# EAGLE board lab 3 hw REWORK (EAGLE 9.7.0)

Size 163.45 x 71.86 mm. Coordinates in mm from the lower left corner, seen from the top.
Outline: 0,0 163.46,0 163.46,71.86 0,71.86 0,0
Copper layers (1*16): Top 0.035mm / dielectric 1.5mm / Bottom 0.035mm
Design rules "default": minimum track width 6mil, minimum drill 0.35mm, track to track 6mil, track to pad 6mil, pad to pad 6mil, via to via 6mil, smd to smd 6mil, copper to edge 40mil, drill to drill 6mil, minimum pad ring 10mil, minimum via ring 8mil, stop-mask expansion 4mil, vias tented up to drill 0mil, thermal gap 10mil

## Footprints (pad centres in the part's own frame; a part is rotated, then mirrored left to right if it is on the bottom)
LEDRD254W60D565H860B = drill 0.981 pad 1.581: 1 -1.27,0; 2 1.27,0
LEDRD254W60D565H860B_G = drill 0.981 pad 1.581: 1 -1.27,0; 2 1.27,0
LEDRD254W60D565H860B_O = drill 0.981 pad 1.581: 1 -1.27,0; 2 1.27,0
BATTERY-GENERIC = drill 1.118 pad 3.15 octagon: + 2.54,0; - -2.54,0
RESAD1016W63L850D250B = drill 0.83 pad 1.43: 1 -5.08,0; 2 5.08,0
78B06ST = drill 0.8: 1 -6.35,-3.81; 2 -3.81,-3.81; 3 -1.27,-3.81; 4 1.27,-3.81; 5 3.81,-3.81; 6 6.35,-3.81; 7 6.35,3.81; 8 3.81,3.81; 9 1.27,3.81; 10 -1.27,3.81; 11 -3.81,3.81; 12 -6.35,3.81
DIP762W53P254L1969H508Q14B = drill 0.743 pad 1.343: 1 -3.81,7.62; 2 -3.81,5.08; 3 -3.81,2.54; 4 -3.81,0; 5 -3.81,-2.54; 6 -3.81,-5.08; 7 -3.81,-7.62; 8 3.81,-7.62; 9 3.81,-5.08; 10 3.81,-2.54; 11 3.81,0; 12 3.81,2.54; 13 3.81,5.08; 14 3.81,7.62

## Placement (x,y rotation side)
D1  RED  [LEDRD254W60D565H860B]  6.06,39.57 180 top
D2  GREEN  [LEDRD254W60D565H860B_G]  11.14,39.57 180 top
D3  RED  [LEDRD254W60D565H860B]  16.22,39.57 180 top
D4  ORANGE  [LEDRD254W60D565H860B_O]  21.3,39.57 180 top
P3  BATTERYGENERIC  [BATTERY-GENERIC]  78.27,63.61 180 top
R1  100  [RESAD1016W63L850D250B]  7.33,29.41 90 top
R2  100  [RESAD1016W63L850D250B]  12.41,29.41 90 top
R3  100  [RESAD1016W63L850D250B]  17.49,29.41 90 top
R4  100  [RESAD1016W63L850D250B]  22.57,29.41 90 top
R5  100  [RESAD1016W63L850D250B]  152.11,9.77 240 top
R6  100  [RESAD1016W63L850D250B]  149.57,9.77 240 top
R7  100  [RESAD1016W63L850D250B]  147.03,9.77 240 top
R8  100  [RESAD1016W63L850D250B]  144.49,9.77 240 top
R9  100  [RESAD1016W63L850D250B]  141.95,9.77 240 top
R10  100  [RESAD1016W63L850D250B]  154.65,9.77 240 top
SW1  SPST-678B06ST  [78B06ST]  150.84,28.14 0 top
U1  74HC08_PDIP  [DIP762W53P254L1969H508Q14B]  40.35,28.14 90 top
U2  74HC32_PDIP  [DIP762W53P254L1969H508Q14B]  63.21,28.14 90 top
U3  74HC04_PDIP  [DIP762W53P254L1969H508Q14B]  86.07,28.14 90 top
U4  74HC86_PDIP  [DIP762W53P254L1969H508Q14B]  119.09,28.14 90 top

## Library data of the parts
D1 D3 = Tinkercad; CATEGORY: Opto-Electronic; SUB-CATEGORY: LED; VALUE: LED_RED
D2 = Tinkercad; CATEGORY: Opto-Electronic; SUB-CATEGORY: LED; VALUE: LED_GREEN
D4 = Tinkercad; CATEGORY: Opto-Electronic; SUB-CATEGORY: LED; VALUE: LED_ORANGE
P3 R1-R10 SW1 U1-U4 = Tinkercad

## Nets
D1_A: D1.1 R1.2
D2_A: D2.1 R2.2
D3_A: D3.1 R3.2
D4_A: D4.1 R4.2
P3+: P3.+ SW1.7 SW1.8 SW1.9 SW1.10 SW1.11 SW1.12 U1.14 U2.14 U3.14
P3-: D1.2 D2.2 D3.2 D4.2 P3.- R5.2 R6.2 R7.2 R8.2 R9.2 R10.2 U1.7 U2.7 U3.7
SW1_4: R6.1 SW1.4
SW1_5: R5.1 SW1.5
SW1_6: R10.1 SW1.6
U1_1A: R8.1 SW1.2 U1.1 U3.3
U1_1Y: U1.3 U2.2
U1_4Y: R1.1 U1.11
U2_1Y: U1.12 U2.3
U3_1A: R9.1 SW1.1 U3.1
U3_1Y: U1.13 U3.2
U3_2Y: U2.1 U3.4
U3_3A: R7.1 SW1.3 U3.5
U3_3Y: U1.2 U3.6

## Tracks (layer width: path | path; a pad name or v marks a point on that pad's centre or on a via)
D1_A  (1 unrouted)
D2_A  (1 unrouted)
D3_A  (1 unrouted)
D4_A  (1 unrouted)
P3+  (9 unrouted)
P3-  (13 unrouted)
SW1_4  (1 unrouted)
SW1_5  (1 unrouted)
SW1_6  (1 unrouted)
U1_1A  (3 unrouted)
U1_1Y  (1 unrouted)
U1_4Y  (1 unrouted)
U2_1Y  (1 unrouted)
U3_1A  (2 unrouted)
U3_1Y  (1 unrouted)
U3_2Y  (1 unrouted)
U3_3A  (2 unrouted)
U3_3Y  (1 unrouted)